# Altium PCB LoraWio_module.PcbDoc
Units mm, origin at the board's own origin, x right, y up, seen from the top; angles counter-clockwise.
Board outline 41.8 x 28.14 mm, 4 copper layers (TOP, GND, VCC, BOT), stack 1.586 mm thick; 24 components, 18 nets, 106 pads, 288 vias.
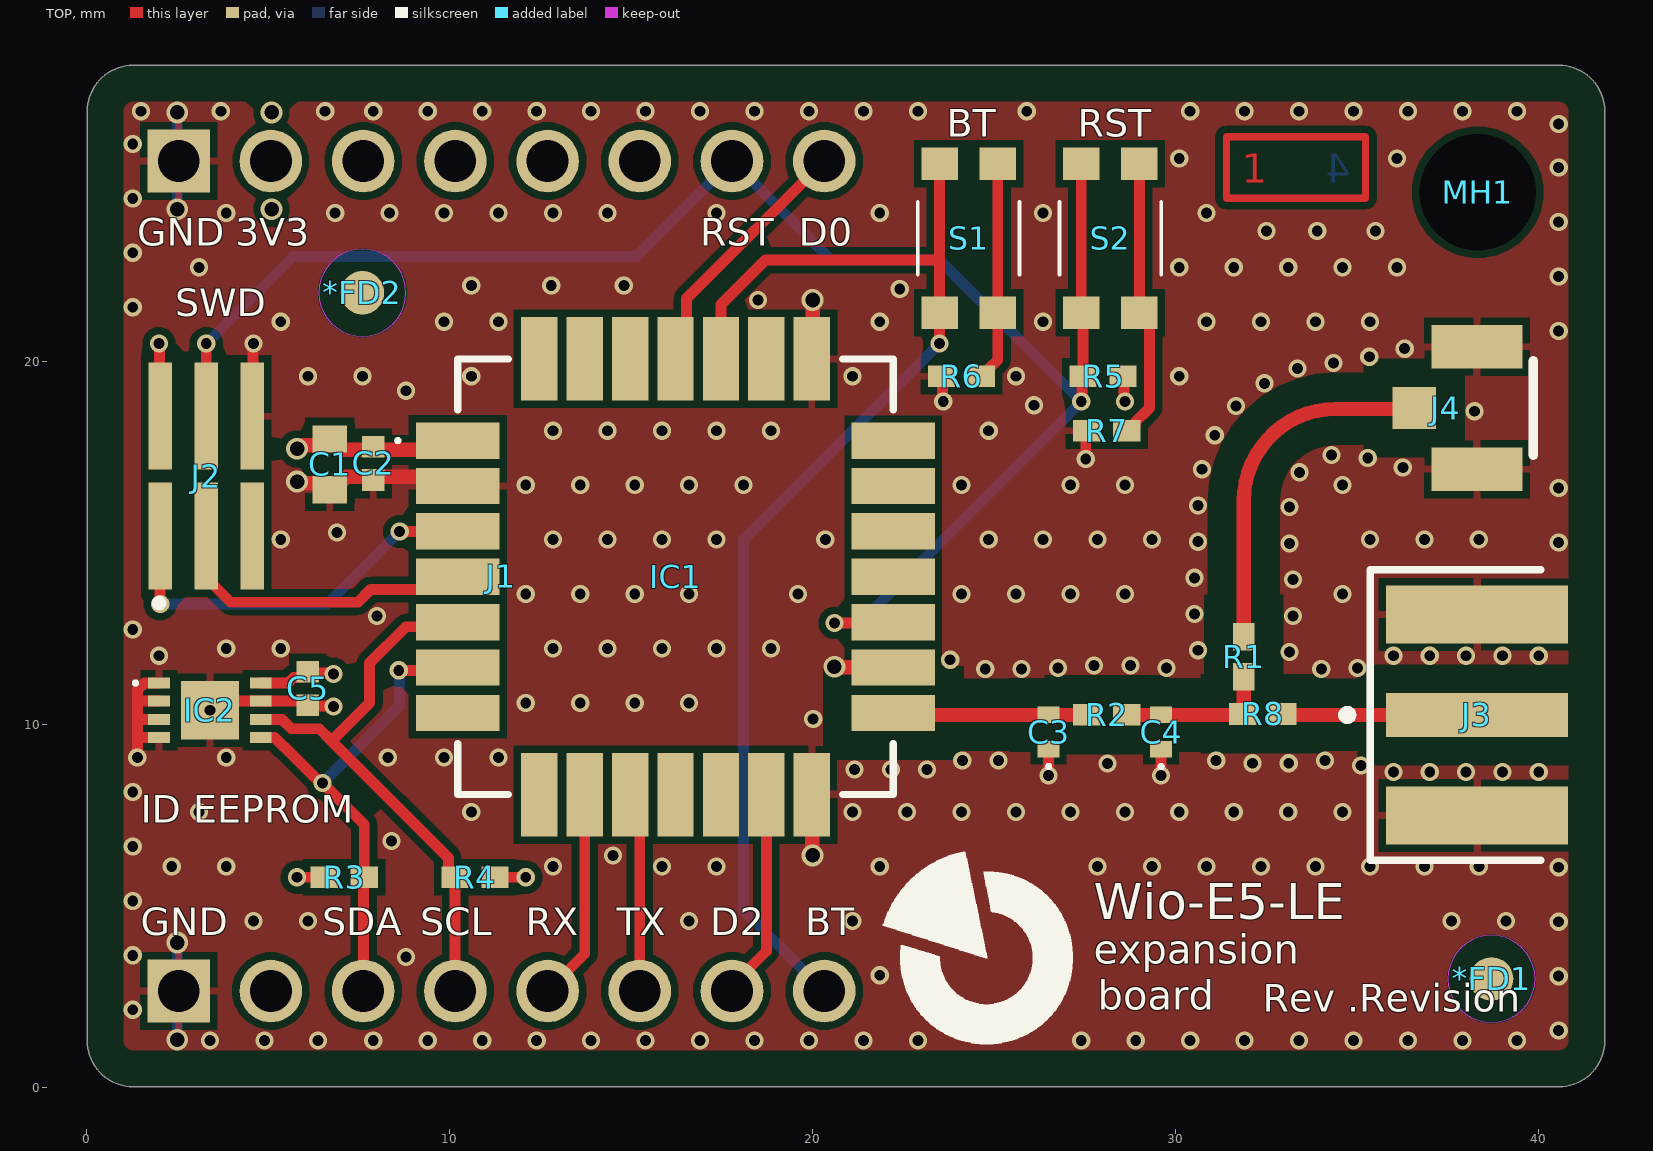
[diagram p0: TOP view]
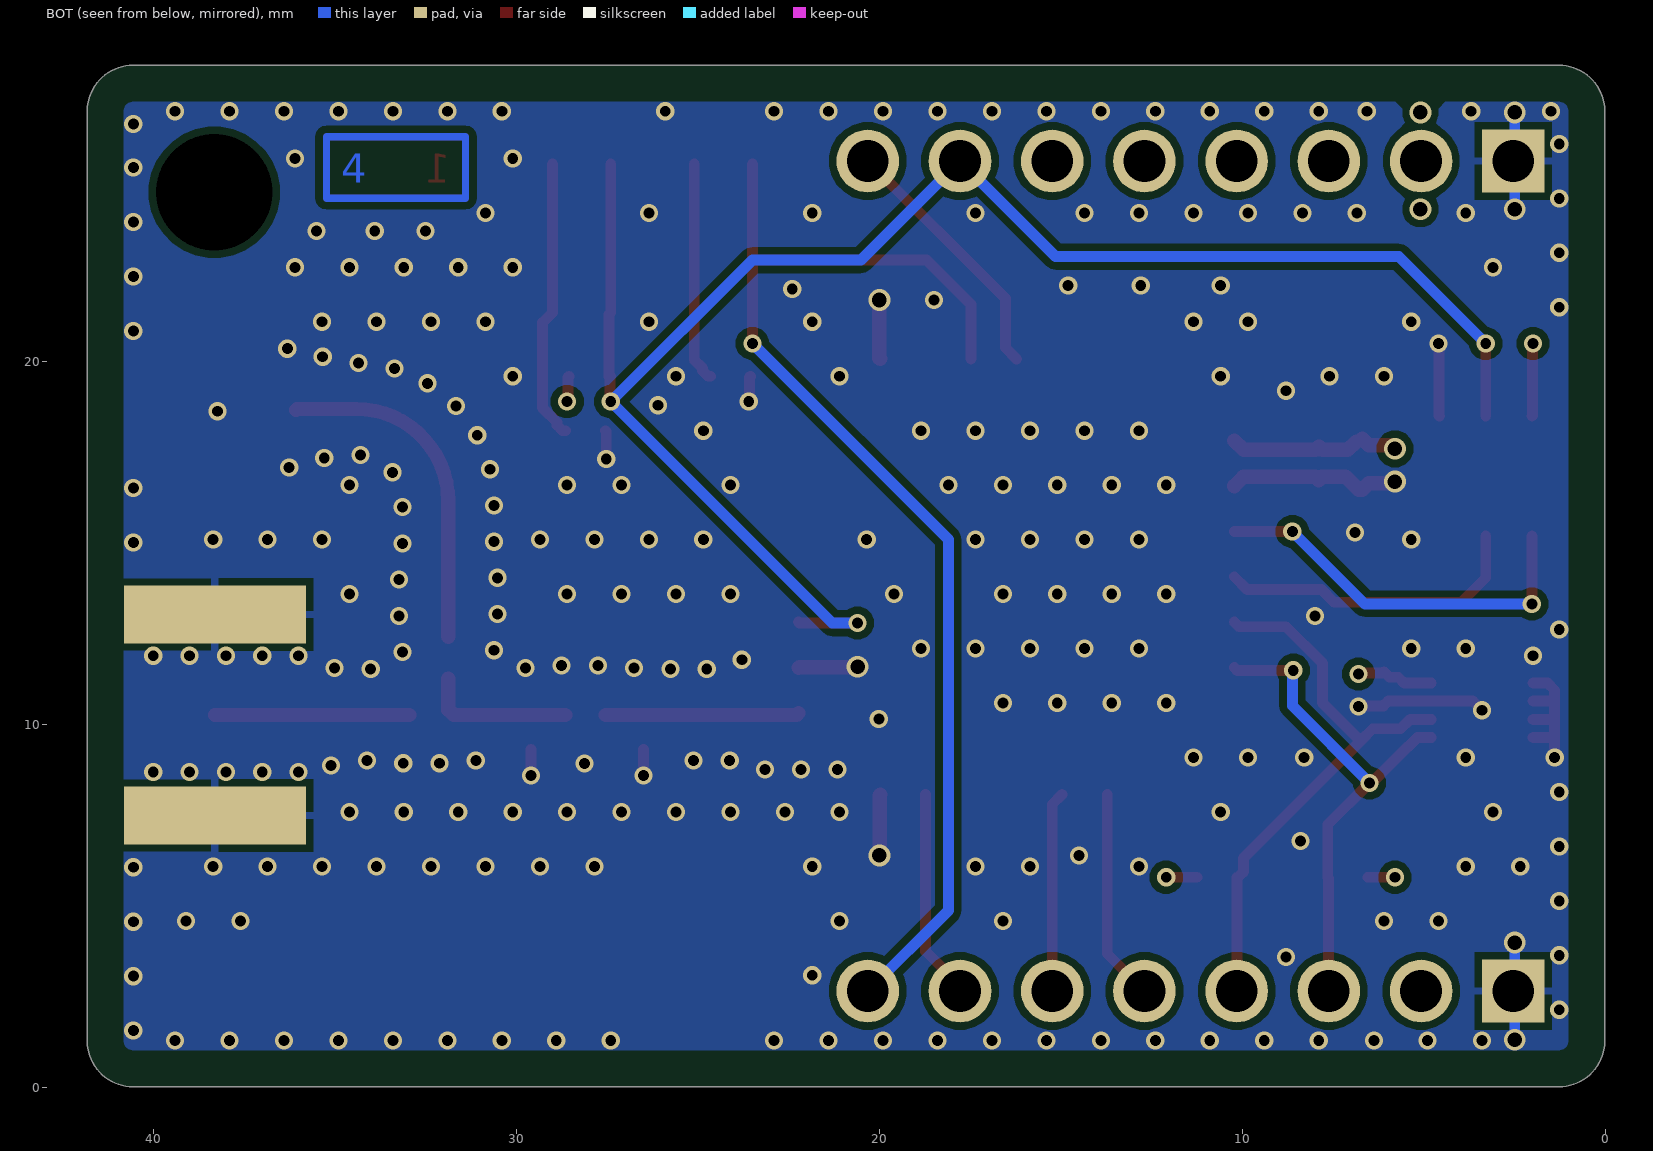
[diagram p1: BOT view, seen from below]
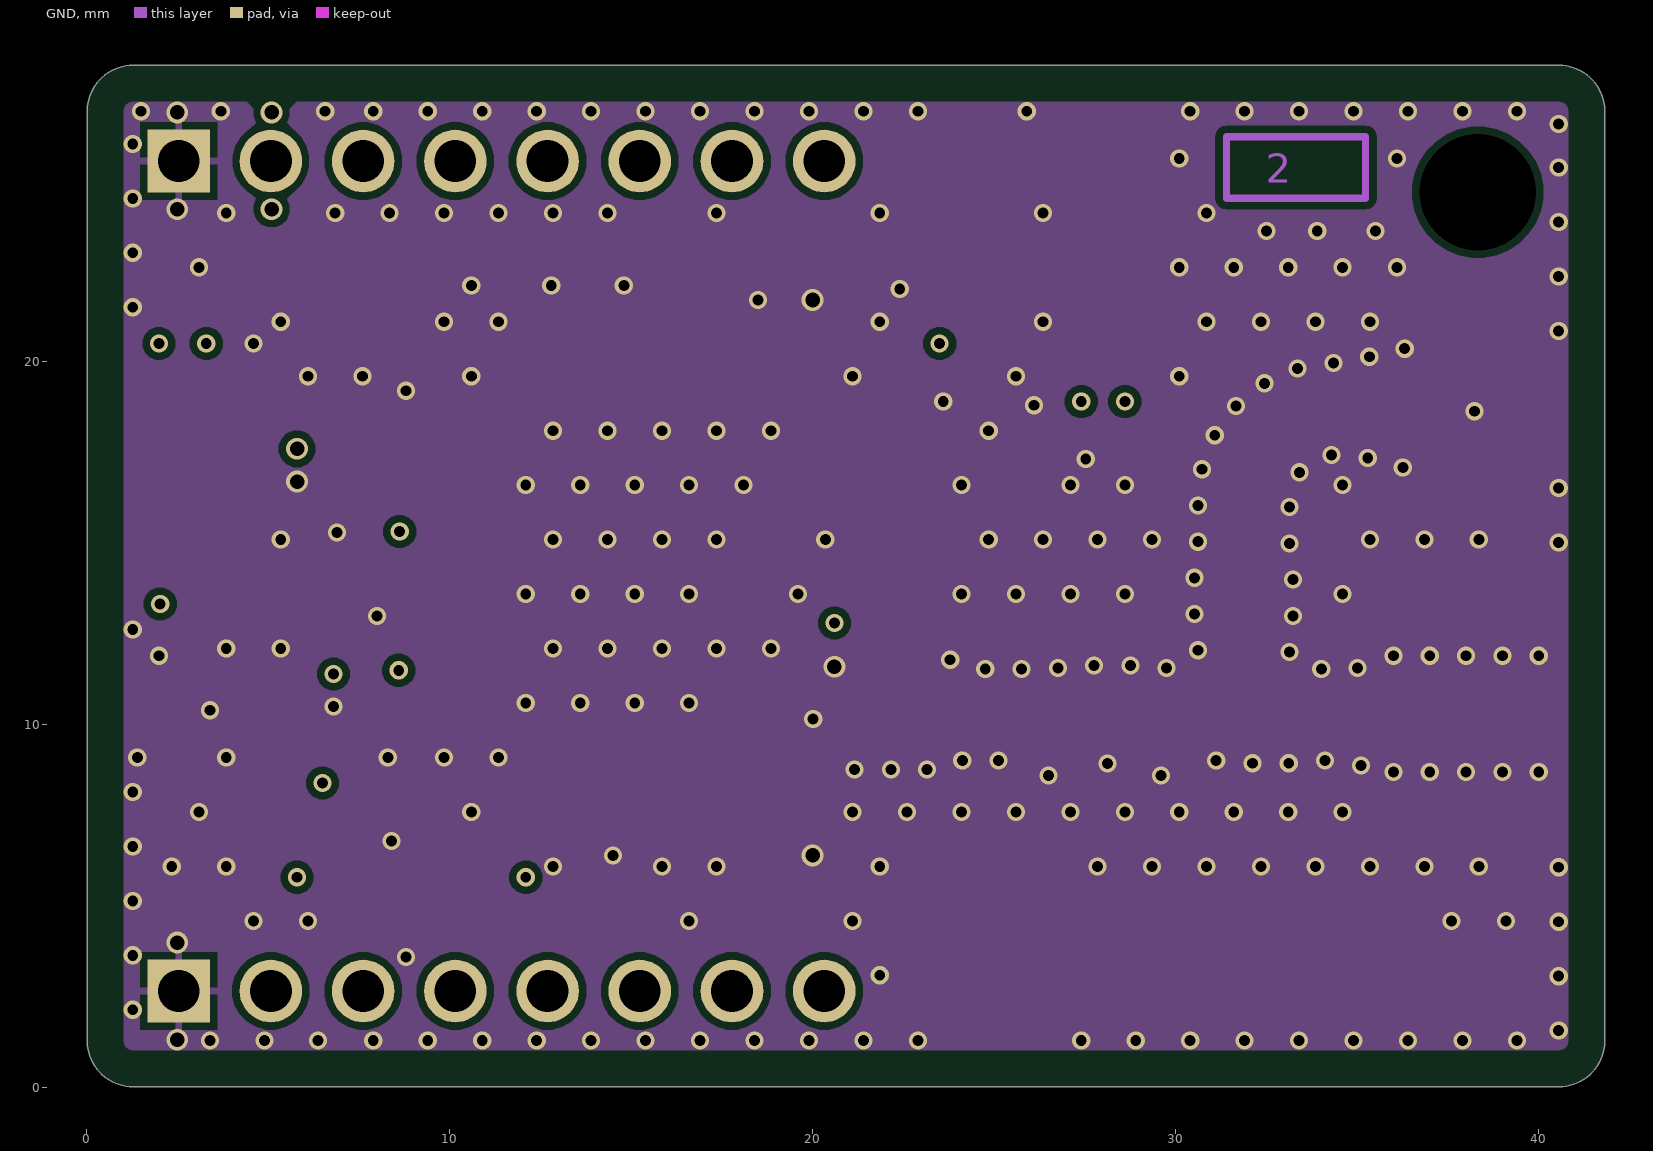
[diagram p2: GND]
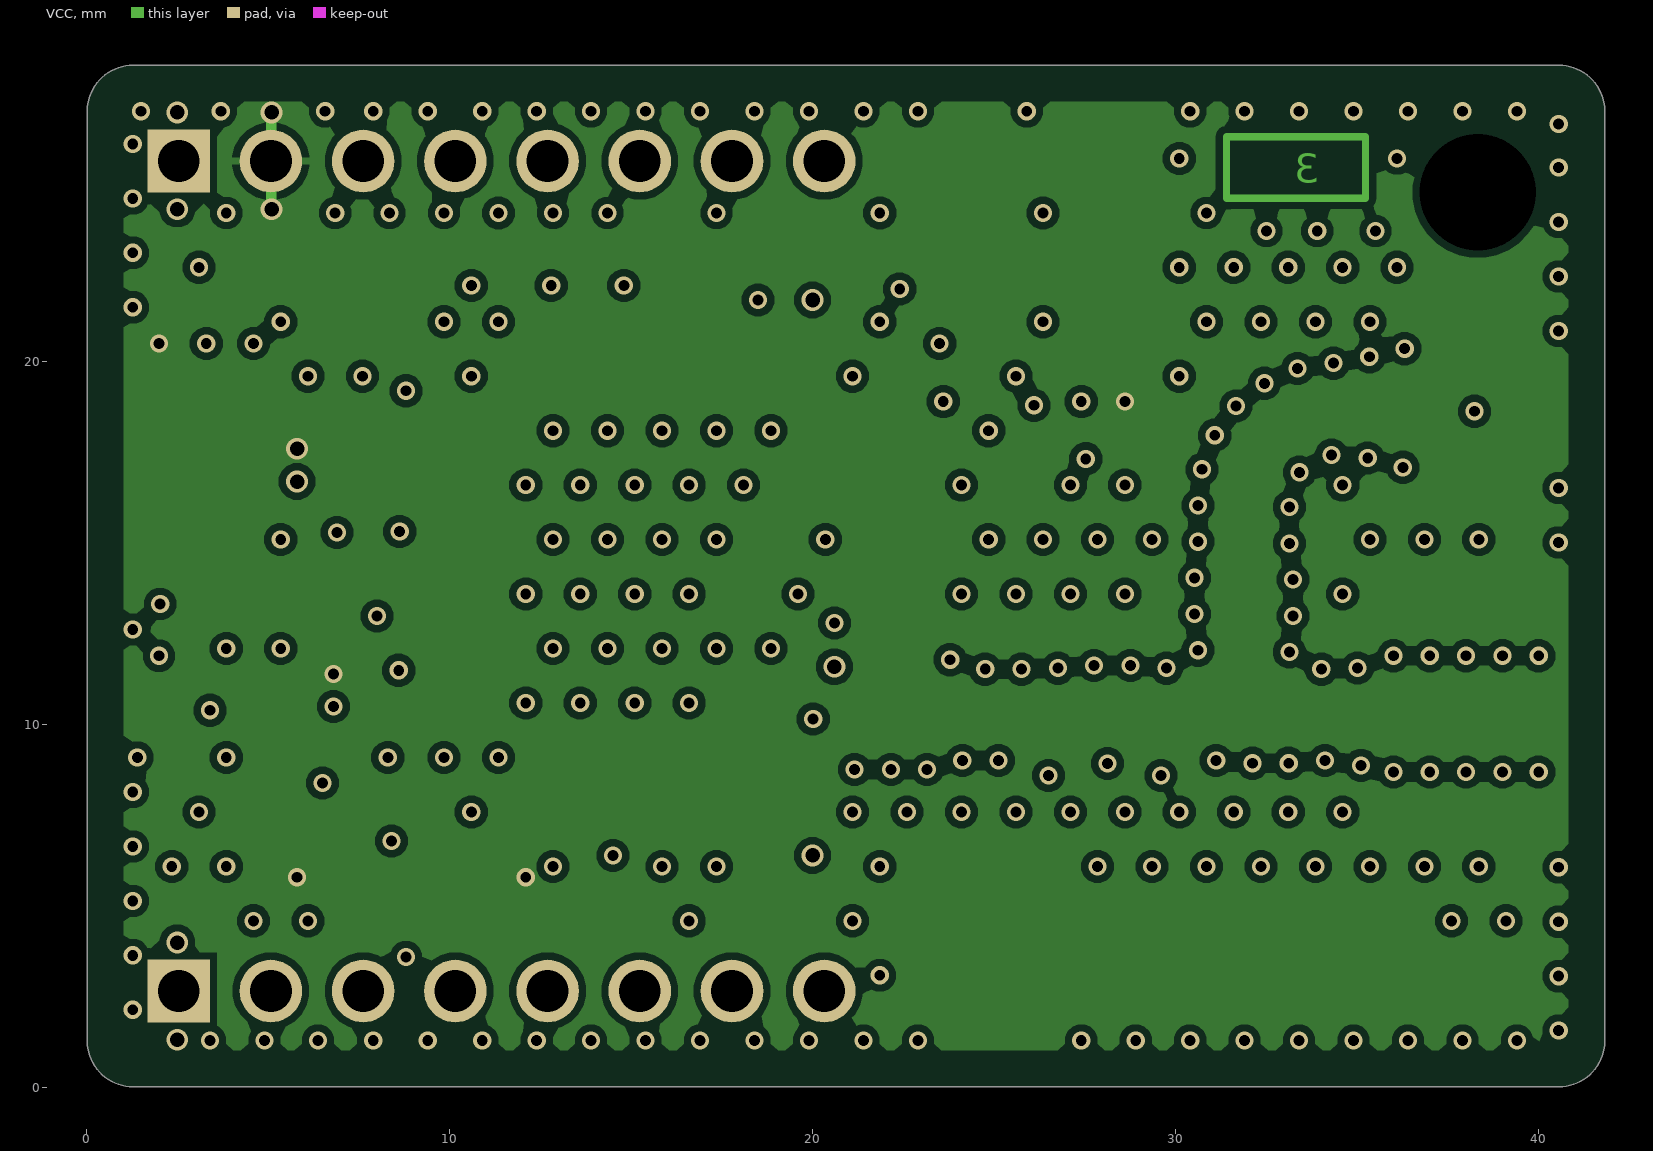
[diagram p3: VCC]

## Layer stack, top to bottom
Top Solder: solder mask 0.01, Solder Resist, Dk 3.5
TOP: signal copper 0.035
Dielectric 2: prepreg 0.2104, PP-006, Dk 4.1
GND: signal copper 0.0152
Dielectric 1: dielectric 1.065, FR-4, Dk 4.8
VCC: signal copper 0.0152
Dielectric 3: prepreg 0.2104, PP-006, Dk 4.1
BOT: signal copper 0.035
Bottom Solder: solder mask 0.01, Solder Resist, Dk 3.5

## Board outline
1.29,0.027 cw(c1.29,1.297) 0.02,1.297 0.02,26.897 cw(c1.29,26.897) 1.29,28.167 40.55,28.167 cw(c40.55,26.897) 41.82,26.897 41.82,1.297 cw(c40.55,1.297) 40.55,0.027

## Design rules (kind name [scope] priority, off if disabled: settings)
BoardOutlineClearance BoardOutlineClearance_ConnFids [InComponent('CON*') or InComponent('*FD*')] p1: gap=0.5 ignorepadtopadclearanceinfootprint=FALSE
BoardOutlineClearance [All] p2: gap=1 ignorepadtopadclearanceinfootprint=FALSE
Clearance RF_cleerance [InNetClass('RF_50')] p1: gap=0.2 ignorepadtopadclearanceinfootprint=FALSE except(0.8: Arc-Fill Arc-Poly Arc-Region Track-Fill Track-Poly Track-Region SMDPad-Fill SMDPad-Poly SMDPad-Region)
Clearance Clearance_T400 [InComponent('T400')and IsPad vs InComponent('T400')and IsPad] p2: gap=0.133 ignorepadtopadclearanceinfootprint=FALSE
Clearance Clearance_Gnd2Pwr [InNet('V-IN') or InNet('V-IN1') or InNet('V-IN2') vs InNet('GND')] p3: gap=0.5 ignorepadtopadclearanceinfootprint=FALSE
Clearance Clearance-ConRTD [InNet('RTD-CH*') vs InNet('ISO_P_GND')] p4: gap=0.3 ignorepadtopadclearanceinfootprint=FALSE
Clearance Clearance-ConnSignals [InNet('V-IN') or InNet('GND-IN') or InNet('A') or InNet('B')] p5: gap=0.5 ignorepadtopadclearanceinfootprint=FALSE
Clearance [All] p6: gap=0.2 ignorepadtopadclearanceinfootprint=FALSE
ComponentClearance ComponentClearance_TP [InComponent('TP*') vs InComponent('CON*')] p1: gap=0 collisioncheckmode=3 verticalgap=0 showdistances=FALSE
ComponentClearance ComponentClearance_CONN [InComponent('CON*') vs InComponent('CON*')] p2: gap=0 collisioncheckmode=3 verticalgap=0 showdistances=FALSE
ComponentClearance [All] p3: gap=0.254 collisioncheckmode=3 verticalgap=0.254 showdistances=FALSE
Height [All] p1: minheight=0 maxheight=100 prefheight=12.7
HoleSize [All] p1: absolutevalues=TRUE maxlimit=5 minlimit=0.2 maxpercent=80.000 minpercent=20.000
HoleToHoleClearance [All] p1: gap=0.5 allowstackedmicrovias=TRUE
MinimumAnnularRing MinimumAnnularRing_Protections [HasFootprint('PWSON-N06_2.0x2.0x0.8-0.65MM_DRV6_1') or HasFootprint('MSOP-8_PP_TI')] p1: minimumring=0.15
MinimumAnnularRing [All] p2: minimumring=0.1
MinimumSolderMaskSliver [All] p1: minsoldermaskwidth=0.025
PasteMaskExpansion [All] p1: expansion=0.05
PolygonConnect PolygonConnect_Via [IsVia] p1: connectstyle=Direct reliefconductorwidth=0.3 reliefentries=4 polygonreliefangle="90 Angle" airgapwidth=0.3
PolygonConnect [All] p2: connectstyle=Relief reliefconductorwidth=0.2 reliefentries=4 polygonreliefangle="90 Angle" airgapwidth=0.2
RoutingCorners [All] p1: cornerstyle=45-Degree minsetback=1 maxsetback=1
RoutingVias [All] p1: holewidth=0.3 width=0.7 viastyle="Through Hole" minholewidth=0.2 minwidth=0.5 maxholewidth=0.5 maxwidth=1.5
SilkToSilkClearance [All] p1: silktosilkclearance=0.2
SilkToSolderMaskClearance [IsPad] p1: minsilkscreentomaskgap=0.125 clearancetoexposedcopper=TRUE
SolderMaskExpansion [All] p1: expansion=0.05 istentingtop=FALSE
SupplyNets "Schematic Supply Nets_1" [InNet('GND')] p1: voltage=0.000
SupplyNets "Schematic Supply Nets" [InNet('3V3')] p2: voltage=0.000
UnRoutedNet [All] p1: checkbadconnections=TRUE
Width Width-RF [InNetClass('RF_50')] p1: maxlimit=0.387 minlimit=0.278 preferedwidth=0.387 toplayer_minwidth=0.387 midlayer1_maxwidth=0.278 midlayer1_prefwidth=0.278 midlayer2_maxwidth=0.278 midlayer2_prefwidth=0.278 bottomlayer_minwidth=0.387 impedanceprofiledriven=TRUE impedanceprofileid={7047A0F7-A557-40CA-A5CA-D74AC53717AC} impedanceprofilevalue=50.000000 minimp=50.000000 maximp=50.000000 favimp=50.000000
Width Width_RS485-IN [InNet('A') or InNet('B') or InNet('TERM_SWA') or InNet('TERM_SWB') or InNet('NetR103_2')] p2: maxlimit=0.5 minlimit=0.2 preferedwidth=0.3
Width Width-Power [InNet('GND-IN') or InNet('V-I*') or InNet('3V3') or InNet('GND') or InNet('5V0') or InNet('ISO_3V3') or InNet('ISO_5V0') or InNet('ISO_GND')] p3: maxlimit=3 minlimit=0.2 preferedwidth=0.45
Width [All] p4: maxlimit=0.5 minlimit=0.2 preferedwidth=0.2
20 further rules are at their usual default settings.

## Classes and differential pairs
component class U_EEPROM_ID: C5 IC2
component class main: *FD1 *FD2 J1 J2 MH1 R3 R4 R5 R6 R7 S1 S2
net class RF_50: AN1_0 AN1_1 AN1_2 AN2_0
component class U_WIO_E5: C1 C2 C3 C4 IC1 J3 J4 R1 R2 R8

## Components (designator, comment, footprint, x,y, rotation, side; value= is the part's Value field where it differs from the comment)
*FD1 "FIDUCIAL" FIDUCIAL 38.7,3 r0 top value=Fiducial
*FD2 "FIDUCIAL" FIDUCIAL 7.6,21.9 r0 top value=Fiducial
C1 "4.7uF" CAPC1608X90N 6.7,17.175 r270 top
C2 "100nF" CAPC1005X70N 7.9,17.2 r90 top
C3 "6.8pF" GCM155 26.5,9.8 r90 top
C4 "6.8pF" GCM155 29.6,9.8 r90 top
C5 "100nF" CAPC1005X70N 6.1,11 r90 top
IC1 "114993120" 114993120 16.225,14.077 r0 top
IC2 "M24C02-FMC6TG" M24C02FMC6TG 3.4,10.4 r270 top
J1 "MicroBUS_conn" MICROBUS_HEADER 2.54,2.667 r0 top locked
J2 "M50-3600342" HUSSP6W42P127_2X3_381X340X440P 3.3,16.85 r0 top
J3 "CON-SMA-EDGE-S" FP-CON-SMA-EDGE-S-MFG 45.56,10.27 r270 top
J4 "ANT1" RECE.20279.001E.01 38.3,18.725 r270 top
MH1 "3.2/3.4mm NP" TH_MH3.2/3.4NP 38.32,24.667 r0 top
R1 "DNP" RESC1005X40N 31.875,11.875 r90 top
R2 "0R" RESC1005X40N 28.1,10.275 r0 top
R3 "DNP" RESC1005X35N 7.1,5.8 r180 top
R4 "DNP" RESC1005X35N 10.7,5.8 r0 top
R5 "DNP" RESC1005X35N 28,19.6 r0 top
R6 "470R" RESC1005X40N 24.1,19.6 r0 top
R7 "470R" RESC1005X40N 28.1,18.1 r0 top
R8 "0R" RESC1005X40N 32.4,10.3 r0 top
S1 "KMR731NG_LFS" KMR731NGLFS 24.3,23.4 r90 top
S2 "KMR731NG_LFS" KMR731NGLFS 28.2,23.4 r90 top

## Footprints (in the part's own frame and the unit in brackets; to place one, negate y for a bottom-side part, rotate by r counter-clockwise, add the part's x,y. Pads: shape width x height; smd on the part's side, far side on the other; paste and mask are expansions set on the pad)
114993120 [mm]
  rect 2.3x1 smd: 1(-6,3.75) 2(-6,2.5) 3(-6,1.25) 4(-6,0) 5(-6,-1.25) 6(-6,-2.5) 7(-6,-3.75) 15(6,-3.75) 16(6,-2.5) 17(6,-1.25) 18(6,0) 19(6,1.25) 20(6,2.5) 21(6,3.75)
  rect 1x2.3 smd: 8(-3.75,-6) 9(-2.5,-6) 10(-1.25,-6) 11(0,-6) 12(1.25,-6) 13(2.5,-6) 14(3.75,-6) 22(3.75,6) 23(2.5,6) 24(1.25,6) 25(0,6) 26(-1.25,6) 27(-2.5,6) 28(-3.75,6)
  silkscreen extent -7.7,-6 6,6, body extent -5.98,-5.98 6.02,6.02, height 1.52
CAPC1005X70N [mm]
  rect 0.6x0.62 smd: 1(-0.46,0) 2(0.46,0)
  body extent -0.5,-0.25 0.5,0.25, height 0.25
CAPC1608X90N [mm]
  rect 0.75x0.94 smd: 1(-0.7,0) 2(0.7,0)
  body extent -0.8,-0.45 0.8,0.45, height 0.8
FIDUCIAL [mm]
  round 1.27 on Mech16: 0(0,0)
  round 1.2 smd paste-10 mask+0.6: ""(0,0)
  TOP keep-out circle w0: c0,0 r1.2
  body extent -1.19,-1.2 1.2,1.2, height 0.05
FP-CON-SMA-EDGE-S-MFG [mm]
  rect 1.2x5 smd paste+0 mask+0: 1(0,-7.26)
  rect 1.6x5 smd paste+0 mask+0: 2(-2.77,-7.26) 3(2.77,-7.26)
  rect 1.6x5 smd far side paste+0 mask+0: 4(-2.77,-7.26) 5(2.77,-7.26)
  silkscreen extent -4,-10.96 4,-5.5, body extent -3.67,-9.86 3.67,4.86, height 0.25
GCM155 [mm]
  rect 0.45x0.6 smd: 1(-0.475,0) 2(0.475,0)
  silkscreen extent -1,-0.05 -0.9,0.05, body extent -0.5,-0.28 0.5,0.27, height 0.5
HUSSP6W42P127_2X3_381X340X440P [mm]
  rect 0.65x2.95 smd: 1(-1.27,-1.65) 2(-1.27,1.65) 3(0,-1.65) 4(0,1.65) 5(1.27,-1.65) 6(1.27,1.65)
  silkscreen extent -1.4,-3.6 -1.2,-3.4, body extent -2.15,-2.75 2.15,2.75, height 5.33
KMR731NGLFS [mm]
  rect 0.9x1 smd: 1(-2.05,-0.8) 2(2.05,-0.8) 3(2.05,0.8) 4(-2.05,0.8)
  silkscreen extent -1,-1.4 1,1.4, body extent -2.3,-1.4 2.3,1.4, height 2.5
M24C02FMC6TG [mm]
  rect 0.3x0.6 smd: 1(-0.75,-1.4) 2(-0.25,-1.4) 3(0.25,-1.4) 4(0.75,-1.4) 5(0.75,1.4) 6(0.25,1.4) 7(-0.25,1.4) 8(-0.75,1.4)
  rect 1.6x1.6 smd: 9(0,0)
  silkscreen extent -0.8,-2.1 -0.7,-2, body extent -1,-1.5 1,1.5, height 0.7
MICROBUS_HEADER [mm]
  rect 1.725x1.725 hole 1.15: 1(0,22.86) 9(0,0)
  round 1.725 hole 1.15: 2(2.54,22.86) 3(5.08,22.86) 4(7.62,22.86) 5(10.16,22.86) 6(12.7,22.86) 7(15.24,22.86) 8(17.78,22.86) 10(2.54,0) 11(5.08,0) 12(7.62,0) 13(10.16,0) 14(12.7,0) 15(15.24,0) 16(17.78,0)
  body extent -1.27,-1.27 19.05,24.13, height 2.5
RECE.20279.001E.01 [mm]
  rect 1.2x2.5 smd: 1(-1.685,0) 2(1.685,0)
  rect 1.15x1.2 smd: 3(0,-1.73)
  silkscreen extent -1.3,1.55 1.3,1.55, body extent -1.5,-1.76 1.5,1.24, height 1.34
RESC1005X35N [mm]
  rect 0.75x0.6 smd: 1(-0.55,0) 2(0.55,0)
  body extent -0.5,-0.25 0.5,0.25, height 0.35
RESC1005X40N [mm]
  rect 0.75x0.6 smd: 1(-0.55,0) 2(0.55,0)
  body extent -0.5,-0.25 0.5,0.25, height 0.4
TH_MH3.2/3.4NP [mm]
  round 0.1 hole 3.2 unplated paste-2539.97 mask+1.65: ""(0,0)
  body extent -1.8,-1.8 1.8,1.8, height 0.05

## Part data
*FD1 *FD2: library part MCH_00028, "Fiducial", Manufacturer=LE, Temperature_Max=125, Temperature_Min=-55, TemperatureRange=Military, Active=1, Autor="Lukas Krahulec", Cat1=Fiducial, ComponentLink1Description="Manufacturer Web", ComponentLink1URL=http://www.logicelements.cz, Designer="Lukas Krahulec", FIT=0, Generic_replacement=No, Jablotron_Price=0, LatestRevisionDate=25.6.2018, LE_Price=0, Librarian="Lukas Krahulec", Location=LE, PartNumber=MCH_00028, RoHS=1, Sourcing=None, Storage_Count=0, Technology=NOP
C1: library part GRM188R61E475KE11J, "Capacitor", Manufacturer_Name="Murata Electronics", Mouser Part Number=81-GRM188R61E475KE1J, Arrow Part Number=GRM188R61E475KE11J, Arrow Price/Stock=https://www.arrow.com/en/products/grm188r61e475ke11j/murata-manufacturing, Datasheet Link=https://search.murata.co.jp/Ceramy/image/img/A01X/G101/ENG/GRM188R61E475KE11-01A.pdf, Height=0.9mm, Manufacturer_Part_Number=GRM188R61E475KE11J, Mouser Price/Stock=https://www.mouser.co.uk/ProductDetail/Murata-Electronics/GRM188R61E475KE11J?qs=hNud%2FORuBR3%2Fa9GLJFT8KA%3D%3D
C2 C5: library part GRM155R61A104KA01D, "Capacitor", Manufacturer_Name="Murata Electronics", Mouser Part Number=81-GRM155R61A104KA01, Arrow Part Number=GRM155R61A104KA01D, Arrow Price/Stock=https://www.arrow.com/en/products/grm155r61a104ka01d/murata-manufacturing?utm_currency=USD&region=europe, Datasheet Link=https://search.murata.co.jp/Ceramy/image/img/A01X/G101/ENG/GRM155R61A104KA01-02A.pdf, Height=0.7mm, Manufacturer_Part_Number=GRM155R61A104KA01D, Mouser Price/Stock=https://www.mouser.co.uk/ProductDetail/Murata-Electronics/GRM155R61A104KA01D?qs=5bAuhL3RhmNZw0v59AqOJA%3D%3D
C3 C4: library part GCM1555C1H6R8BA16J, "Capacitor", Manufacturer_Name="Murata Electronics", Mouser Part Number=81-GCM1555C1H6R8BA6J, Datasheet Link=https://search.murata.co.jp/Ceramy/image/img/A01X/G101/ENG/GCM1555C1H6R8BA16-01A.pdf, Height=0.55mm, Manufacturer_Part_Number=GCM1555C1H6R8BA16J, Mouser Price/Stock=https://www.mouser.co.uk/ProductDetail/Murata-Electronics/GCM1555C1H6R8BA16J?qs=QzBtWTOodeUHvskaC%252BV70A%3D%3D
IC1: "Integrated Circuit", Manufacturer_Name="Seeed Studio", Mouser Part Number=713-114993120, Arrow Part Number=114993120, Arrow Price/Stock=https://www.arrow.com/en/products/114993120/seeed-technology-limited?utm_currency=USD&region=nac, Datasheet Link=https://files.seeedstudio.com/products/114993120/Wio-E5-LE%20module%20datasheet_v1.0.pdf, Height=2.7mm, Manufacturer_Part_Number=114993120, Mouser Price/Stock=https://www.mouser.co.uk/ProductDetail/Seeed-Studio/114993120?qs=QpmGXVUTftHkewPVPDVW5g%3D%3D
IC2: "Integrated Circuit", Manufacturer_Name=STMicroelectronics, Mouser Part Number=511-M24C02-FMC6TG, Arrow Part Number=M24C02-FMC6TG, Arrow Price/Stock=https://www.arrow.com/en/products/m24c02-fmc6tg/stmicroelectronics?region=nac, Datasheet Link=https://www.st.com/resource/en/datasheet/m24c01-r.pdf, Height=0.6mm, Manufacturer_Part_Number=M24C02-FMC6TG, Mouser Price/Stock=https://www.mouser.co.uk/ProductDetail/STMicroelectronics/M24C02-FMC6TG?qs=WHlX%252B%252B9%2FRwB%252BxJ8bQxWbzQ%3D%3D
J1: "Connector", Manufacturer_Name=Harwin, Manufacturer_Part_Number=M20-9730845, Mouser Part Number=855-M20-9730845, Datasheet Link=https://cdn.harwin.com/pdfs/M20-973.pdf, Height=9.54mm, Mouser Price/Stock=https://www.mouser.co.uk/ProductDetail/Harwin/M20-9730845?qs=%252Bk6%2F5FB6qrnRfgIEPS4Dkw%3D%3D, system=Connector
J2: "Connector", Manufacturer_Name=Harwin, Mouser Part Number=855-M50-3600342, Datasheet Link=https://cdn.harwin.com/pdfs/M50-360.pdf, Manufacturer_Part_Number=M50-3600342, Mouser Price/Stock=https://www.mouser.co.uk/ProductDetail/Harwin/M50-3600342?qs=uLfVlVfCHH3O1msIjvLxbQ%3D%3D
J3: library part CMP-204357-000001-1, "CONN SMA JACK STR EDGE MNT", Frequency=18GHz, Manufacturer="RF Solutions Ltd.", Package=CONN_JACK, Automotive=No, Category=Conn, ComponentLink2Description=Datasheet, ComponentLink2URL=https://www.rfsolutions.co.uk/downloads/1498648656DS-CON-EDGE-SMA-4.pdf, Conn Orientation="Right Angle", Contact Material=Gold, Device Class L1=Connectors, Device Class L2="RF / Coaxial Connectors", Device Class L3=unset, Digikey Description="CONN SMA JACK STR EDGE MNT", Footprint Url=https://forum.upverter.com/uploads/default/original/3X/b/e/be75b907af57498775929d6d9099689c472e0307.pdf, Height=6.35mm, Impedance=50Ω, Is Female=yes, Lead Free=Yes, Manufacturer Part Number=CON-SMA-EDGE-S, Number of Contacts=1, Octopart=https://octopart.com/con-sma-edge-s-rf+solutions-70967450, RoHS=TRUE, Shielding=true
J4: library part RECE-20279-001E-01, "Connector", Manufacturer_Name=Taoglas, Mouser Part Number=N/A, Manufacturer_Part_Number=RECE-20279-001E-01, Mouser Price/Stock=https://www.mouser.co.uk/ProductDetail/Taoglas/RECE-20279-001E-01?qs=WUa1z%2FNV9%252B3mVij1vDlP0A%3D%3D
MH1: library part MCH_00037, "(Mount Hole 3.2mm)", Manufacturer=LE, Temperature_Max=125, Temperature_Min=-55, TemperatureRange=Military, Active=1, Autor="Lukas Krahulec", Cat1="Mounting Holes", Cat2=Non-Plated, Cat3="3.2 mm", ComponentLink1Description="Manufacturer Web", ComponentLink1URL=http://www.logicelements.cz, Designer="Lukas Krahulec", FIT=0, Generic_replacement=No, Jablotron_Price=0, LatestRevisionDate=24.2.2020, LE_Price=0, Librarian="Lukas Krahulec", Location=LE, PartNumber=MCH_00037, RoHS=1, Sourcing=None, Storage_Count=0, Technology=NOP
R1 R2 R8: library part RCA04020000ZSED, "Resistor", Manufacturer_Name=Vishay, Mouser Part Number=71-RCA04020000ZSED, Arrow Part Number=RCA04020000ZSED, Arrow Price/Stock=https://www.arrow.com/en/products/rca04020000zsed/vishay?utm_currency=USD&region=nac, Datasheet Link=https://componentsearchengine.com/Datasheets/2/RCA04020000ZSED.pdf, Height=0.4mm, Manufacturer_Part_Number=RCA04020000ZSED, Mouser Price/Stock=https://www.mouser.co.uk/ProductDetail/Vishay-Draloric/RCA04020000ZSED?qs=gk21WLQFtgRTmhk63km%2F1w%3D%3D
R3 R4 R5: library part RT0402FRE075K1L, "Resistor", Manufacturer_Name=YAGEO, Datasheet Link=https://www.yageo.com/upload/media/product/app/datasheet/rchip/pyu-rt_1-to-0.01_rohs_l.pdf, Height=0.35mm, Manufacturer_Part_Number=RT0402FRE075K1L, Mouser Part Number=RT0402FRE075K1L, Mouser Price/Stock=https://www.mouser.co.uk/ProductDetail/YAGEO/RT0402FRE07100RL?qs=BXCcY9r%252B08AcvLZjF7vcwQ%3D%3D
R6 R7: library part RC0402JR-07470RL, "Resistor", Manufacturer_Name=KEMET, Mouser Part Number=603-RC0402JR-07470RL, Arrow Part Number=RC0402JR-07470RL, Arrow Price/Stock=https://www.arrow.com/en/products/rc0402jr-07470rl/yageo, Datasheet Link=http://www.yageo.com/documents/recent/PYu-RC0402_51_RoHS_L_6_r.pdf, Height=0.4mm, Manufacturer_Part_Number=RC0402JR-07470RL, Mouser Price/Stock=https://www.mouser.co.uk/ProductDetail/Yageo/RC0402JR-07470RL/?qs=uM1JSSdPjOBB2HN7BZcUiA%3D%3D
S1 S2: "Switch", Arrow Part Number="KMR731NG LFS", Manufacturer_Name="C & K COMPONENTS", Mouser Part Number=611-KMR731NGLFS, Arrow Price/Stock=https://www.arrow.com/en/products/kmr731nglfs/ck, Datasheet Link=https://www.ckswitches.com/media/1908/kmr7.pdf, Manufacturer_Part_Number="KMR731NG LFS", Mouser Price/Stock=https://www.mouser.com/Search/Refine.aspx?Keyword=611-KMR731NGLFS

## Via types
v1: diameter 0.5, hole 0.3, TOP to BOT, tented both sides, 277 vias
v2: diameter 0.6, hole 0.4, TOP to BOT, tented both sides, 11 vias

## Nets (pads, with @x,y where several pads share a name; then routed paths per layer and width w, separated by ;. In a path a pad name is that pad's centre, name@x,y a point inside that pad or via, vN(x,y) a via of type N, cw(c..) or ccw(c..) an arc to the next point about the centre after c; other vN are vias at no path point)
3V3: C1.1 C2.2 C5.2 IC1.1 IC2.8 J1.2 J2.2 R3.2 R4.2 R5.2 | length 13.8
  TOP w0.3: v1(2,20.5) 2.015,20.485 2.015,18.515 J2.2 ; IC2.8 5.55,11.15 5.71,11.31 5.95,11.31 C5.2 6.13,11.43 6.77,11.43 v1(6.8,11.4) ; v1(5.8,5.8) R3.2 ; R4.2 v1(12.1,5.8) ; R5.2 28.575,19.575 28.575,18.925 v1(28.6,18.9)
  TOP w0.4: v2(5.8,17.6) 5.854,17.6 5.954,17.7 6.525,17.7 C1.1 ; C1.1@6.87,17.8 7.098,17.572 7.802,17.572 C2.2@7.89,17.66 ; C2.2 7.988,17.572 9.97,17.572 IC1.1
  VCC w0.3: v2(5.1,24.2) 5.09,24.21 5.09,25.517 J1.2 5.09,25.537 5.09,26.857 v2(5.1,26.867)
AN1_0: C3.2 IC1.15 R2.1 | length 5.4
  TOP w0.387: IC1.15 22.277,10.275 C3.2 ; C3.2@26.4,10.275 R2.1
AN1_1: C4.2 R1.1 R2.2 R8.1 | length 4.1
  TOP w0.387: R2.2 C4.2@29.5,10.275 ; C4.2 31.725,10.275 31.856,10.406 31.875,10.406 R1.1@31.875,11.277
AN1_2: J3.1 R8.2 | length 5.4
  TOP w0.387: R8.2@32.95,10.275 38.295,10.275 J3.1
AN2_0: J4.3 R1.2 | length 9.4
  TOP w0.387: R1.2 31.875,16.163 cw(c34.415,16.163) 34.415,18.703 36.042,18.703 J4.3@36.07,18.675
BT: IC1.24 J1.16 S1.3 S1.4 | length 34
  TOP w0.3: IC1.24 17.475,21.575 18.7,22.8 23.5,22.8 ; v1(23.5,20.5) S1.4 23.5,22.8 ; S1.3 23.5,22.8
  BOT w0.3: J1.16 18.1,4.887 18.1,15.1 v1(23.5,20.5)
GND: C1.2 C2.1 C3.1 C4.1 C5.1 IC1.2 IC1.14 IC1.16 IC1.22 IC2.1 IC2.2 IC2.3 IC2.4 IC2.7 IC2.9 J1.1 J1.9 J2.6 J3.2 J3.3 J3.4 J3.5 J4.1 J4.2 R6.1 R7.1 | length 28
  TOP w0.3: v1(1.4,9.1) 1.4,9.65 ; IC2.4 1.4,9.65 ; IC2.3 1.45,10.15 1.4,10.1 ; IC2.2 1.45,10.65 1.4,10.6 ; IC2.1 1.6,11.15 1.4,10.95 1.4,10.6 ; v1(3.4,10.4) 3.65,10.65 IC2.7 5.99,10.65 C5.1 6.12,10.52 6.78,10.52 v1(6.8,10.5) ; J2.6 4.585,18.515 4.585,20.485 v1(4.6,20.5) ; R6.1 23.575,19.575 23.575,18.925 v1(23.6,18.9) ; v1(26.5,8.6) C3.1 ; v1(27.525,17.325) 27.525,18.075 R7.1 ; v1(29.6,8.6) C4.1 ; 1.4,9.65 1.4,10.1 ; 1.4,10.1 1.4,10.6
  TOP w0.4: v2(5.8,16.7) 5.854,16.7 5.904,16.65 6.525,16.65 C1.2 ; C1.2@6.795,16.475 7.151,16.831 7.809,16.831 C2.1 7.991,16.831 9.971,16.831 IC1.2 ; IC1.14 19.988,8.064 19.988,6.412 v2(20,6.4) ; IC1.22 20,20.102 v2(20,21.7) ; v2(20.6,11.6) 20.611,11.589 22.213,11.589 IC1.16
  BOT w0.3: v2(2.5,1.327) 2.5,2.627 J1.9 2.5,2.707 v2(2.5,4) ; v2(2.5,24.2) 2.5,25.487 J1.1 2.5,25.567 v2(2.5,26.867)
  other v1: 3.4,1.3 4.9,1.3 6.375,1.3 7.9,1.3 9.4,1.3 10.9,1.3 12.4,1.3 13.9,1.3 15.4,1.3 16.9,1.3 18.4,1.3 19.9,1.3 21.4,1.3 22.9,1.3 27.4,1.3 28.9,1.3 30.4,1.3 31.9,1.3 33.4,1.3 34.9,1.3 36.4,1.3 37.9,1.3 39.4,1.3 40.55,1.575 1.275,2.15 40.55,3.075 21.85,3.1 8.8,3.6 1.275,3.65 40.55,4.575 4.6,4.6 6.1,4.6 16.6,4.6 21.1,4.6 37.6,4.6 39.1,4.6 1.275,5.15 40.55,6.075 2.35,6.1 3.85,6.1 12.85,6.1 15.85,6.1 17.35,6.1 21.85,6.1 27.85,6.1 29.35,6.1 30.85,6.1 32.35,6.1 33.85,6.1 35.35,6.1 36.85,6.1 38.35,6.1 14.5,6.4 1.275,6.65 8.4,6.8 3.1,7.6 10.6,7.6 21.1,7.6 22.6,7.6 24.1,7.6 25.6,7.6 27.1,7.6 28.6,7.6 30.1,7.6 31.6,7.6 33.1,7.6 34.6,7.6 1.275,8.15 36,8.7 37,8.7 38,8.7 39,8.7 40,8.7 21.156,8.768 22.156,8.768 23.156,8.768 35.102,8.882 28.12,8.936 32.114,8.941 33.114,8.941 24.124,9.018 25.124,9.018 31.116,9.012 34.111,9.018 3.85,9.1 8.3,9.1 9.85,9.1 11.35,9.1 20.016,10.156 12.1,10.6 13.6,10.6 15.1,10.6 16.6,10.6 24.755,11.532 25.755,11.532 34.012,11.532 26.755,11.559 29.749,11.559 35.011,11.567 27.752,11.634 28.752,11.634 23.79,11.792 2,11.9 36,11.9 37,11.9 38,11.9 39,11.9 40,11.9 33.132,12.006 30.618,12.053 3.85,12.1 5.35,12.1 12.85,12.1 14.35,12.1 15.85,12.1 17.35,12.1 18.85,12.1 1.275,12.625 8,13 33.234,13 30.516,13.048 12.1,13.6 13.6,13.6 15.1,13.6 16.6,13.6 19.6,13.6 24.1,13.6 25.6,13.6 27.1,13.6 28.6,13.6 34.6,13.6 33.234,14 30.516,14.048 33.132,14.995 30.618,15.043 40.55,15.025 5.35,15.1 12.85,15.1 14.35,15.1 15.85,15.1 17.35,15.1 20.35,15.1 24.85,15.1 26.35,15.1 27.85,15.1 29.35,15.1 35.35,15.1 36.85,15.1 38.35,15.1 6.9,15.3 33.132,15.995 30.618,16.043 40.55,16.525 12.1,16.6 13.6,16.6 15.1,16.6 16.6,16.6 18.1,16.6 24.1,16.6 27.1,16.6 28.6,16.6 34.6,16.6 33.415,16.954 30.724,17.037 36.256,17.091 35.29,17.348 34.294,17.432 31.076,17.973 12.85,18.1 14.35,18.1 15.85,18.1 17.35,18.1 18.85,18.1 24.85,18.1 38.229,18.635 31.664,18.782 26.1,18.8 8.8,19.2 32.447,19.405 6.1,19.6 7.6,19.6 10.6,19.6 21.1,19.6 25.6,19.6 30.1,19.6 33.361,19.81 34.349,19.96 35.334,20.135 36.309,20.359 40.55,20.85 5.35,21.1 9.85,21.1 11.35,21.1 21.85,21.1 26.35,21.1 30.85,21.1 32.35,21.1 33.85,21.1 35.35,21.1 1.275,21.5 18.5,21.7 22.4,22 10.6,22.1 12.8,22.1 14.8,22.1 40.55,22.35 3.1,22.6 30.1,22.6 31.6,22.6 33.1,22.6 34.6,22.6 36.1,22.6 1.275,23 32.5,23.6 33.9,23.6 35.5,23.6 40.55,23.85 3.85,24.1 6.85,24.1 8.35,24.1 9.85,24.1 11.35,24.1 12.85,24.1 14.35,24.1 17.35,24.1 21.85,24.1 26.35,24.1 30.85,24.1 1.275,24.5 40.55,25.35 30.1,25.6 36.1,25.6 1.275,26 40.55,26.55 1.5,26.9 3.7,26.9 6.575,26.9 7.9,26.9 9.4,26.9 10.9,26.9 12.4,26.9 13.9,26.9 15.4,26.9 16.9,26.9 18.4,26.9 19.9,26.9 21.4,26.9 22.9,26.9 25.9,26.9 30.4,26.9 31.9,26.9 33.4,26.9 34.9,26.9 36.4,26.9 37.9,26.9 39.4,26.9
GPIO0: IC1.25 J1.8 | length 7.1
  TOP w0.3: IC1.25 16.531,20.383 16.531,21.738 J1.8
GPIO2: IC1.13 J1.15 | length 5.8
  TOP w0.3: J1.15 17.78,2.818 18.725,3.763 IC1.13
NetR6_2: R6.2 S1.1 S1.2 | length 6.1
  TOP w0.3: R6.2 24.725,19.6 24.875,19.75 24.875,19.825 25.1,20.05 S1.2
NetR7_2: R7.2 S2.1 S2.2 | length 7.8
  TOP w0.3: R7.2 28.725,18.1 28.875,18.25 28.875,18.326 29.275,18.726 29.275,21.075 S2.1 S2.2
RST: IC1.17 J1.7 J2.4 R5.1 S2.3 S2.4 | length 48.5
  TOP w0.3: J2.4 v1(3.3,20.5) ; v1(20.6,12.8) 22.198,12.8 IC1.17 ; v1(27.4,18.9) 27.425,18.925 27.425,19.575 R5.1@27.4,19.6 ; S2.3 S2.4 27.45,21.3 R5.1
  BOT w0.3: v1(3.3,20.5) 5.696,22.896 15.149,22.896 J1.7 20.507,22.8 23.5,22.8 v1(27.4,18.9) 21.3,12.8 v1(20.6,12.8)
RX: IC1.9 J1.13 | length 5.8
  TOP w0.3: J1.13 13.725,3.692 IC1.9
SCL: IC1.5 IC2.6 J1.12 R4.1 | length 16
  TOP w0.3: IC2.6 5.385,10.15 5.645,9.89 6.41,9.89 6.75,9.55 ; R4.1 10.119,5.8 9.969,5.95 9.969,6.331 6.75,9.55 ; R4.1@10.155,5.795 10.155,2.672 J1.12 ; IC1.5 10.099,12.701 8.801,12.701 7.8,11.7 7.8,10.6 6.75,9.55
SDA: IC1.6 IC2.5 J1.11 R3.1 | length 14.1
  TOP w0.3: IC2.5 5.178,9.65 5.438,9.39 5.456,9.39 6.446,8.4 v1(6.5,8.4) 7.65,7.25 R3.1 7.635,5.785 7.635,2.682 J1.11 ; v1(8.6,11.5) 10.148,11.5 IC1.6
  BOT w0.3: v1(6.5,8.4) 8.623,10.523 8.623,11.477 v1(8.6,11.5)
SWCLK: IC1.4 J2.3 | length 8.6
  TOP w0.3: J2.3 3.3,14.05 3.975,13.375 7.475,13.375 7.827,13.727 9.875,13.727 IC1.4
SWDIO: IC1.3 J2.1 | length 10.9
  TOP w0.3: v1(2.03,13.33) J2.1 ; v1(8.627,15.327) IC1.3
  BOT w0.3: v1(2.03,13.33) 6.63,13.33 v1(8.627,15.327)
TX: IC1.10 J1.14 | length 5.5
  TOP w0.3: IC1.10 15.24,7.812 J1.14
pads on no net: *FD1. *FD1.0 *FD2. *FD2.0 IC1.7 IC1.8 IC1.11 IC1.12 IC1.18 IC1.19 IC1.20 IC1.21 IC1.23 IC1.26 IC1.27 IC1.28 J1.3 J1.4 J1.5 J1.6 J1.10 J2.5 MH1.
copper on no net: | length 44.2
  TOP w0.2: 31.4,24.5 35.229,24.5 35.229,26.2 31.4,26.2 31.4,24.5
  GND w0.2: 31.4,24.5 31.4,26.2 35.229,26.2 35.229,24.5 31.4,24.5
  VCC w0.2: 31.4,24.5 35.229,24.5 35.229,26.2 31.4,26.2 31.4,24.5
  BOT w0.2: 31.4,24.5 35.229,24.5 35.229,26.2 31.4,26.2 31.4,24.5

## Polygon pours and split planes (outlines as drawn)
GND on TOP "NONET_L01_P-001" (solid, remove dead copper, pour order 1): 0,0 0,28.167 41.82,28.167 41.82,0
GND on BOT "NONET_L01_P-001" (solid, remove dead copper, pour order 0): 0,0 0,28.167 41.82,28.167 41.82,0
GND on GND "NONET_L01_P-001" (solid, remove dead copper, pour order 4): 0,0 0,28.167 41.82,28.167 41.82,0
3V3 on VCC "NONET_L01_P-001" (solid, remove dead copper, pour order 3): 0,0 0,28.167 41.82,28.167 41.82,0

## Other copper
TOP:
  pour cut-out: 7.603,20.676 cw(c7.603,21.897) 6.383,21.897 cw(c7.603,21.897) 7.603,23.118 cw(c7.603,21.897) 8.824,21.897 cw(c7.603,21.897)
  pour cut-out: 38.703,1.776 cw(c38.703,2.997) 37.483,2.997 cw(c38.703,2.997) 38.703,4.218 cw(c38.703,2.997) 39.924,2.997 cw(c38.703,2.997)
  pour cut-out: 35.229,26.2 35.229,24.5 31.4,24.5 31.4,26.2
  pour cut-out: 30.873,14.95 32.875,14.95 32.875,11.277 30.873,11.277
  pour cut-out: 25.75,11.275 34.9,11.275 34.9,9.275 25.75,9.275
  text "1" at 31.825,24.926 h0.8
GND:
  pour cut-out: 35.229,26.2 35.229,24.5 31.4,24.5 31.4,26.2
  text "2" at 32.475,24.926 h0.8
VCC:
  text "3" at 33.975,24.926 h0.8
BOT:
  pour cut-out: 35.229,26.2 35.229,24.5 31.4,24.5 31.4,26.2
  pour cut-out: 35.229,26.2 35.229,24.5 31.4,24.5 31.4,26.2
  text "4" at 34.825,24.926 h0.8

## Silkscreen, mask and mechanical layers (free items; w line width, h text height)
Top Overlay:
  drawing of 2 lines, arcs and shapes, not listed
  text "BT" at 23.7,26.2 h0.76
  text "RST" at 27.3,26.2 h0.76
  text "GND" at 1.4,23.2 h0.76
  text "3V3" at 4.1,23.2 h0.76
  text "RST" at 16.9,23.2 h0.76
  text "D0" at 19.625,23.2 h0.76
  text "SWD" at 2.45,21.25 h0.76
  text "ID EEPROM" at 1.5,7.3 h0.76
  text "Wio-E5-LE" at 27.75,4.65 h1
  text "GND" at 1.5,4.2 h0.76
  text "SDA" at 6.5,4.2 h0.76
  text "SCL" at 9.2,4.2 h0.76
  text "RX" at 12.1,4.2 h0.76
  text "TX" at 14.6,4.2 h0.76
  text "D2" at 17.175,4.2 h0.76
  text "BT" at 19.8,4.2 h0.76
  text "expansion" at 27.75,3.417 h0.8
  text "board" at 27.85,2.15 h0.8
  text "Rev .Revision" at 32.4,2.1 h0.76